# Altium PCB PCB1.PcbDoc
Units mm, origin at the board's own origin, x right, y up, seen from the top; angles counter-clockwise.
Board outline 77.72 x 126.24 mm, 2 copper layers (Top Layer, Bottom Layer); 16 components, 39 nets, 114 pads, 7 vias.
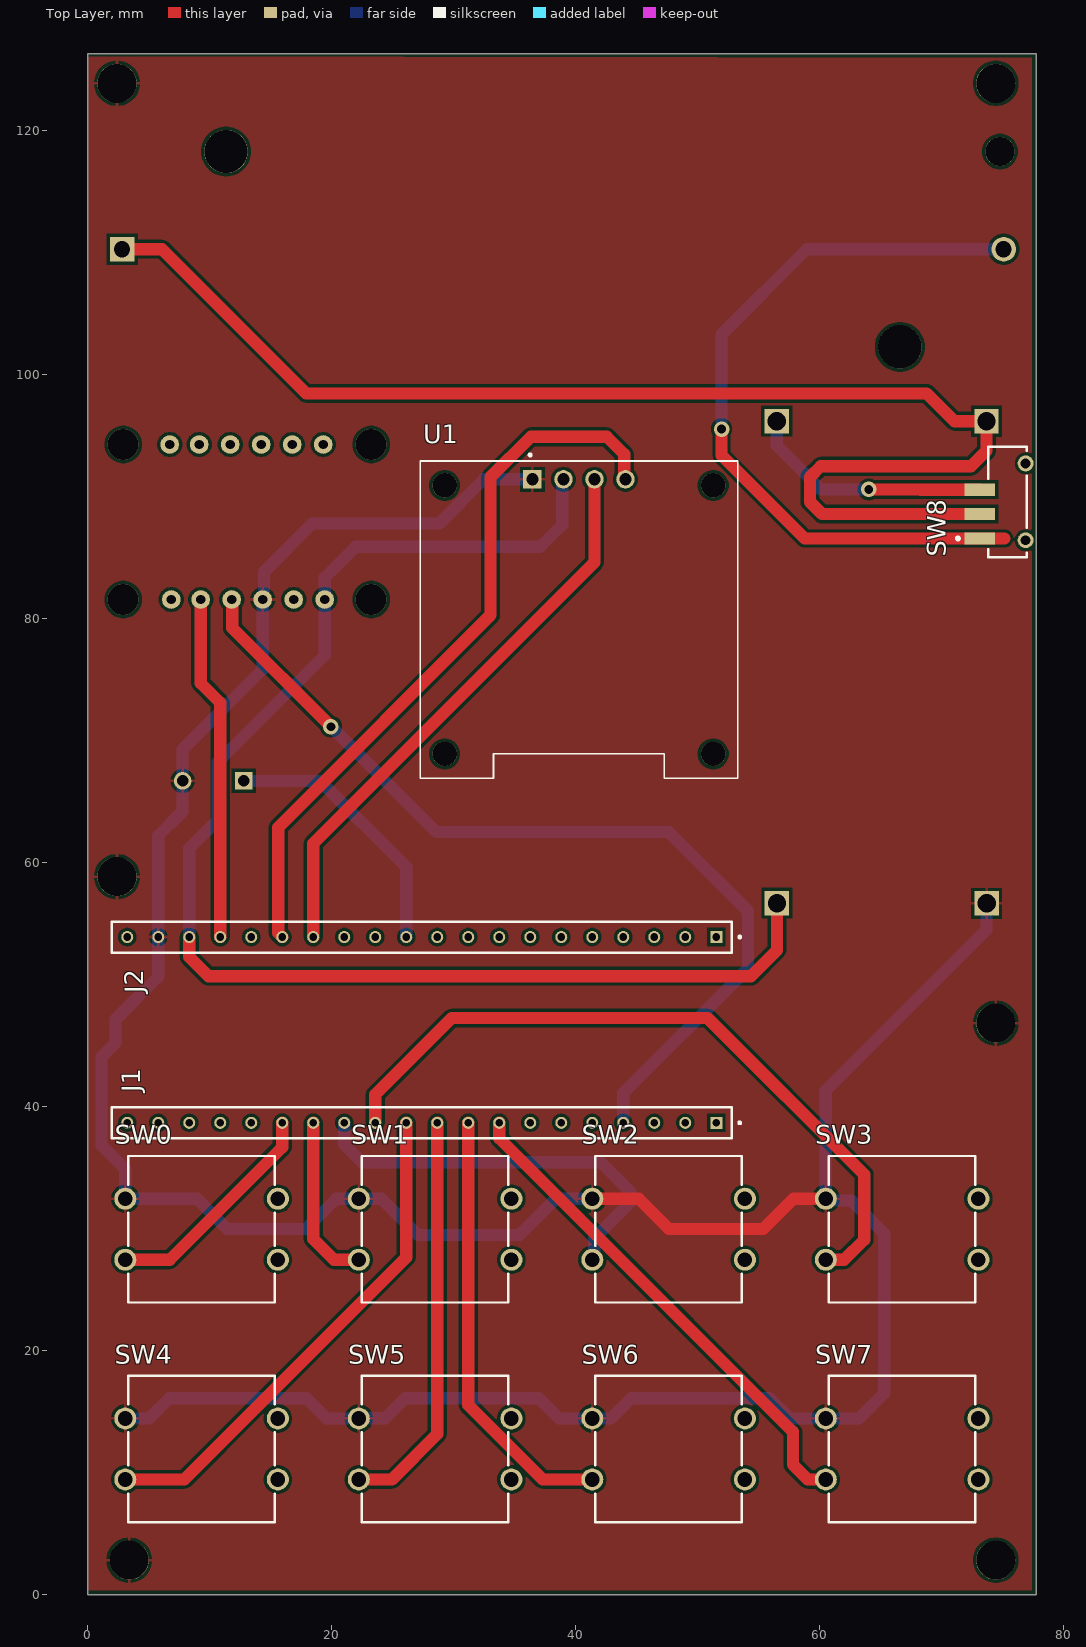
[diagram p0: Top Layer view]
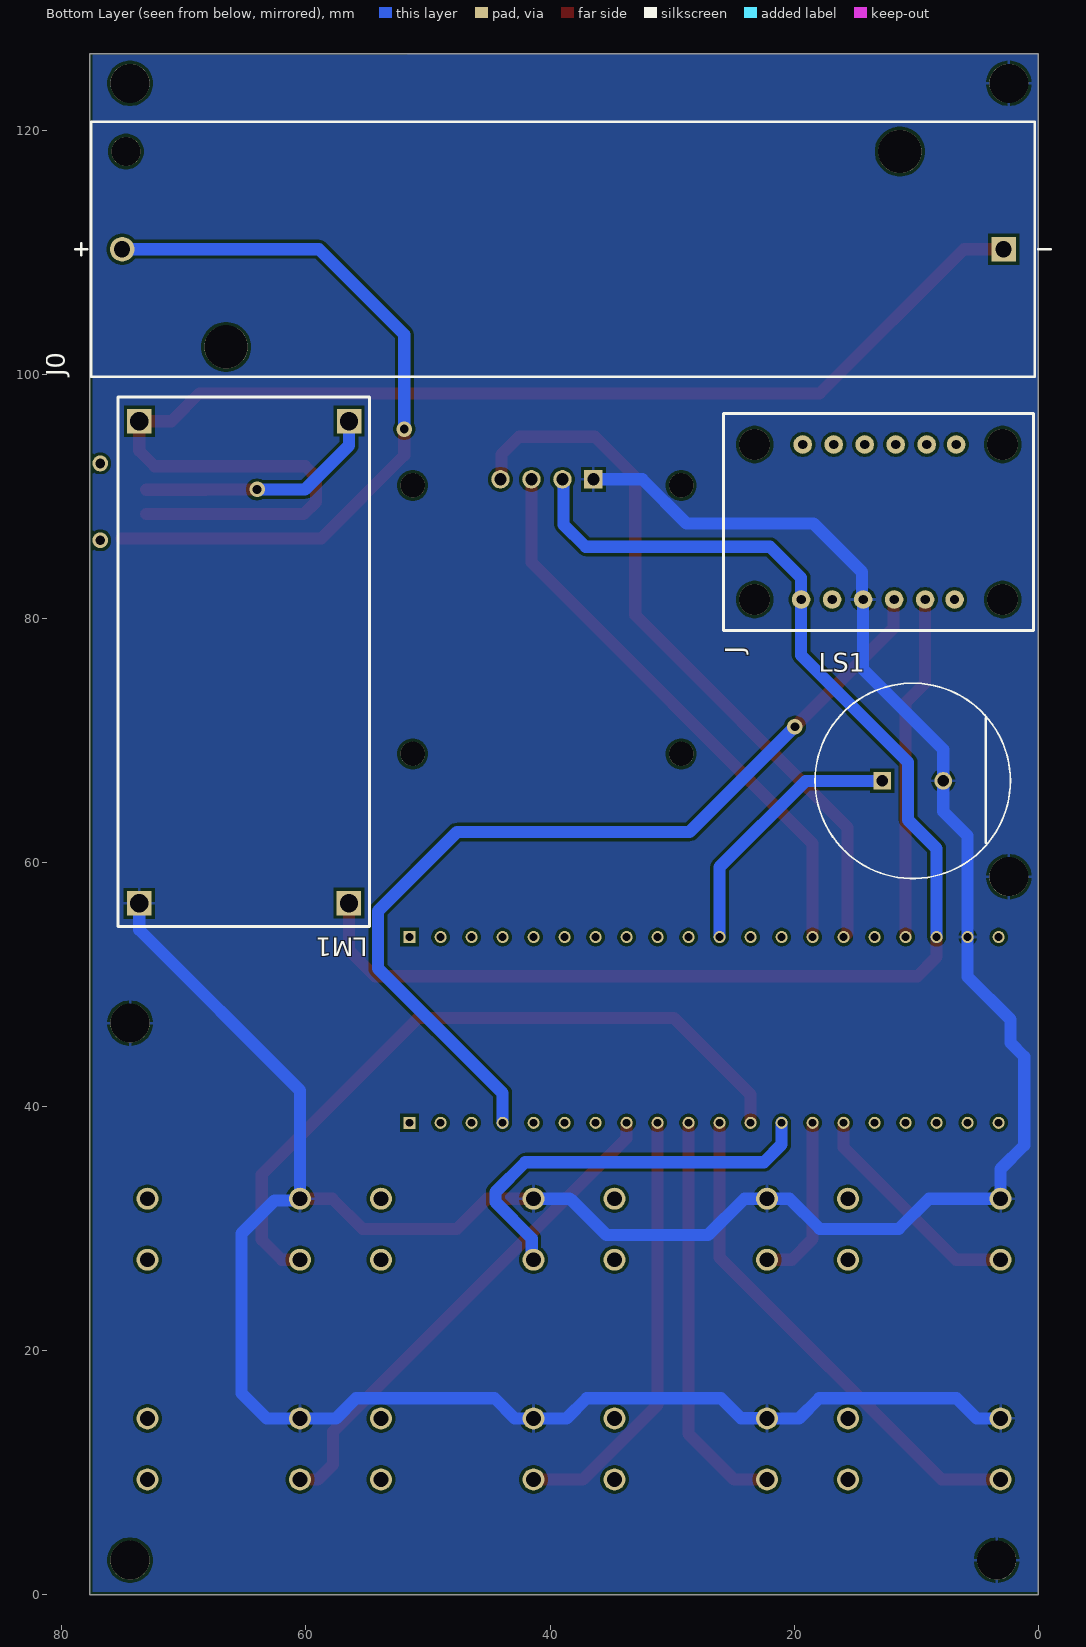
[diagram p1: Bottom Layer view, seen from below]
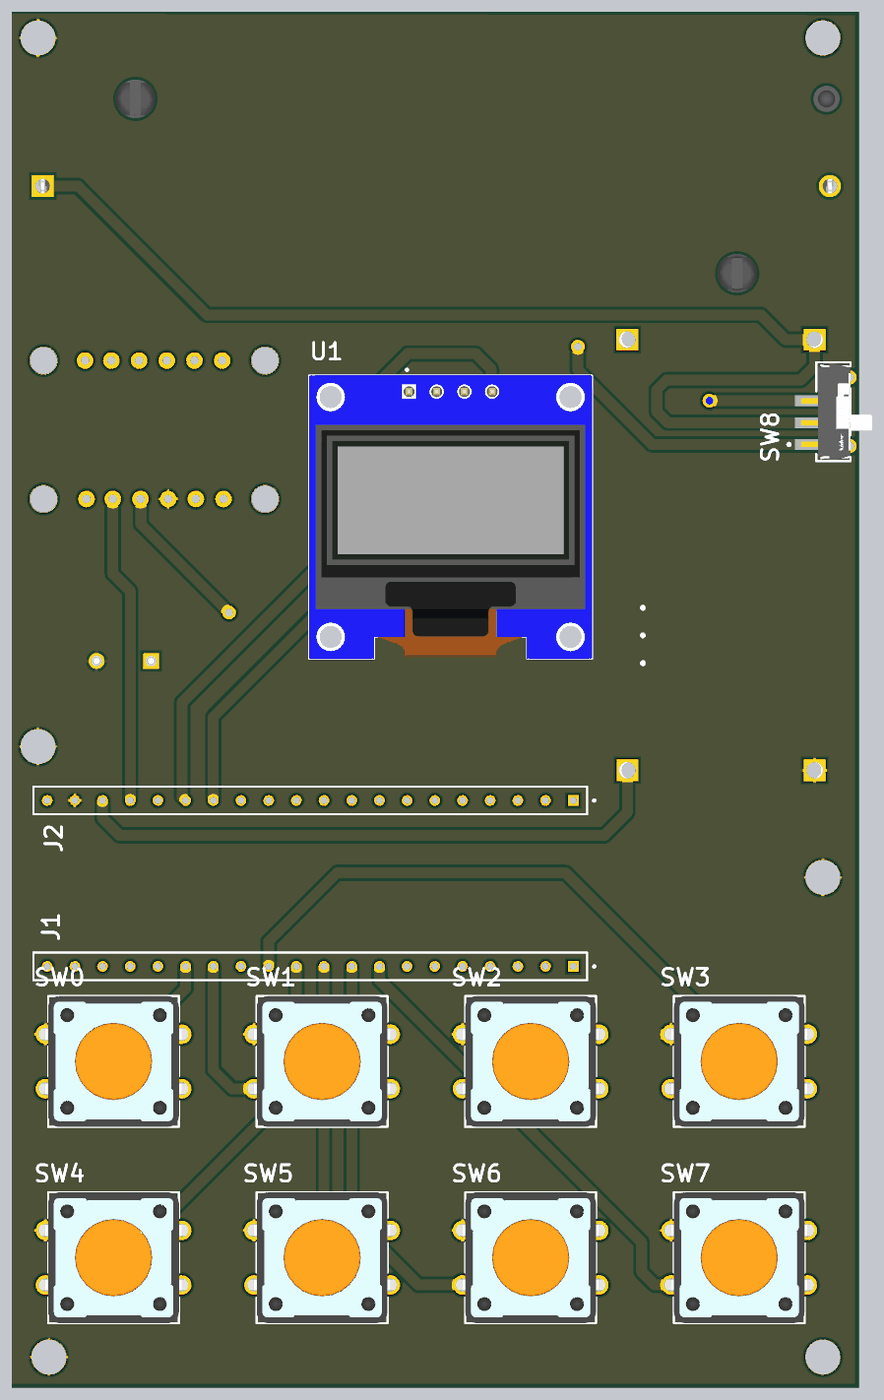
[diagram p2: 3D render of the assembled board from above, using the file's embedded part models]
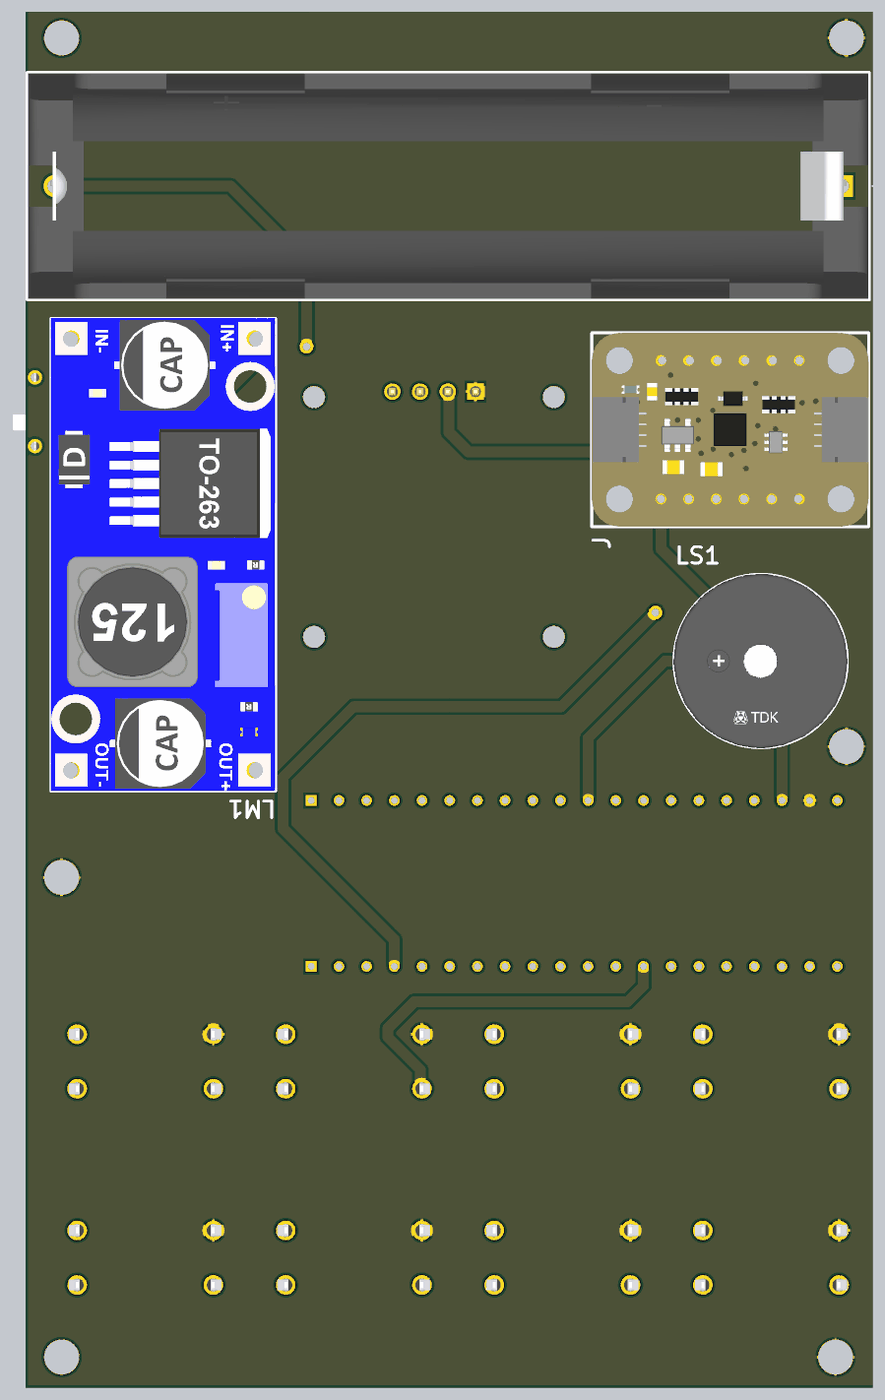
[diagram p3: 3D render of the assembled board from below, using the file's embedded part models]

## Layer stack, top to bottom
Top Solder: solder mask 0.0102, Solder Resist, Dk 3.5
Top Layer: signal copper 0.0356
Dielectric 1: dielectric 0.32, FR-4, Dk 4.8
Bottom Layer: signal copper 0.0356
Bottom Solder: solder mask 0.0102, Solder Resist, Dk 3.5

## Board outline
0,0 77.724,0 77.724,126.238 0,126.238

## Design rules (kind name [scope] priority, off if disabled: settings)
Clearance [All] p1: gap=0.254 ignorepadtopadclearanceinfootprint=FALSE except(0: Arc-Hole Track-Hole SMDPad-Hole THPad-Hole Via-Hole Fill-Hole Poly-Hole Region-Hole Text-Hole)
PolygonConnect [All] p1: connectstyle=Relief reliefconductorwidth=0.254 reliefentries=4 polygonreliefangle="90 Angle" airgapwidth=0.254
RoutingVias [All] p1: holewidth=0.711 width=1.27 viastyle="Through Hole" minholewidth=0.711 minwidth=1.27 maxholewidth=0.711 maxwidth=1.27
SolderMaskExpansion [All] p1: expansion=0.102 istentingtop=FALSE
Width [All] p1: maxlimit=1 minlimit=0.254 preferedwidth=0.254
30 further rules are at their usual default settings.

## Components (designator, comment, footprint, x,y, rotation, side; value= is the part's Value field where it differs from the comment)
J "LIS3DH" PCBComponent_1#1 0.381,78.994 r90 bottom
J0 "1043P" FP-1043P-MFG 38.947,110.236 r0 bottom
J1 "TS-120-T-AA" SAMTEC_TS-120-T-AA 27.381,38.661 r180 top
J2 "TS-120-T-AA" SAMTEC_TS-120-T-AA 27.381,53.881 r180 top
LM1 "LM2596" PCBComponent_1#2 75.639,97.99 r270 bottom
LS1 "SDC1610MT-01" FP-SDC1610MT-01-MFG 10.287,66.675 r180 bottom
SW0 "430476043716" 430476043716 9.341,29.94 r0 top
SW1 "430476043716" 430476043716 28.473,29.94 r0 top
SW2 "430476043716" 430476043716 47.606,29.94 r0 top
SW3 "430476043716" 430476043716 66.738,29.94 r0 top
SW4 "430476043716" 430476043716 9.341,11.94 r0 top
SW5 "430476043716" 430476043716 28.473,11.94 r0 top
SW6 "430476043716" 430476043716 47.606,11.94 r0 top
SW7 "430476043716" 430476043716 66.738,11.94 r0 top
SW8 "CSS-1210TB" FP-CSS-1210TB-MFG 76.454,89.535 r90 top
U1 "DM-OLED096-636" MODULE_DM-OLED096-636 40.259,79.883 r0 top

## Footprints (in the part's own frame and the unit in brackets; to place one, negate y for a bottom-side part, rotate by r counter-clockwise, add the part's x,y. Pads: shape width x height; smd on the part's side, far side on the other; paste and mask are expansions set on the pad)
430476043716 [mm] "12x12mm washable Tact Switch, THT version"
  round 1.8 hole 1.2: A1(-6.25,2.5) A2(6.25,2.5) B1(-6.25,-2.5) B2(6.25,-2.5)
  silkscreen extent -6,-6 6,6, body extent -6.99,-6 6.99,6, height 4.35
FP-1043P-MFG [mm]
  rect 2.02x2.02 hole 1.32 paste-2539.97 mask+0: 1(-36.11,0)
  round 2.02 hole 1.32 paste-2539.97 mask+0: 2(36.11,0)
  round 3.55 hole 3.55 unplated paste-2539.97 mask+0: ""(-27.6,-8) ""(27.6,8)
  round 2.39 hole 2.39 unplated paste-2539.97 mask+0: ""(35.8,-8)
  silkscreen extent -39.95,-10.45 39.95,10.45, body extent -38.53,-10.33 38.53,10.33, height 15.11
FP-CSS-1210TB-MFG [mm]
  rect 1x2.5 smd paste+0 mask+0: 1(-3,3.35) 2(-1,3.35) 3(1,3.35)
  round 1.3 hole 0.8 paste-2539.97 mask+0: 4(-3.15,-0.4) 5(3.15,-0.4)
  silkscreen extent -4.53,-0.5 4.53,5.27, body extent -4.62,-2.75 4.62,4.7, height 0.25
FP-SDC1610MT-01-MFG [mm]
  rect 1.45x1.45 hole 0.95 paste-2539.97 mask+0: 1(-2.5,0)
  round 1.45 hole 0.95 paste-2539.97 mask+0: 2(2.5,0)
  silkscreen extent -8,-8 8,8, body extent -8,-8 8,7.99, height 10
MODULE_DM-OLED096-636 [mm]
  rect 1.508x1.508 / inner round 1.508 / far side rect 1.508x1.508 hole 1: 1(-3.81,11.5)
  round 1.508 hole 1: 2(-1.27,11.5) 3(1.27,11.5) 4(3.81,11.5)
  round 2 hole 2: S1(-11,11) S2(11,11) S3(11,-11) S4(-11,-11)
  silkscreen extent -13,-13 13,13.6, body extent -13,-13 13,13, height 5.66
PCBComponent_1#1 [mil]
  round 60 hole 30: 1(100,750) 2(100,650) 3(100,550) 4(100,450) 5(100,350) 6(100,255) 7(600,250) 8(600,345) 9(600,445) 10(600,545) 11(600,645) 12(600,745)
  silkscreen extent 0,0 700,1000, body extent 0,0 700,1000, height 178
PCBComponent_1#2 [mil]
  rect 78.74x78.74 hole 59.06: 1(1627.38,754.33) 2(1627.87,77.91) 3(72.4,754.69) 4(72.89,78.27)
  silkscreen extent -5,10 1703,821, body extent -6,9 1702,820, height 518
SAMTEC_TS-120-T-AA [mm]
  rect 0.985x0.985 / inner round 0.985 / far side rect 0.985x0.985 hole 0.635: 01(-24.13,0)
  round 0.985 hole 0.635: 02(-21.59,0) 03(-19.05,0) 04(-16.51,0) 05(-13.97,0) 06(-11.43,0) 07(-8.89,0) 08(-6.35,0) 09(-3.81,0) 10(-1.27,0) 11(1.27,0) 12(3.81,0) 13(6.35,0) 14(8.89,0) 15(11.43,0) 16(13.97,0) 17(16.51,0) 18(19.05,0) 19(21.59,0) 20(24.13,0)
  silkscreen extent -26.15,-1.27 25.4,1.27

## Part data
J0: library part CMP-19636-000034-1, "BATT HOLDER 18650 1 CELL PC PIN", Max Operating Temperature=145°C, Min Operating Temperature=-50°C, Package Quantity=50, Mount="Through Hole", Number of Cells=1, Packaging=Tray, Series=-, Termination="PC Pin"
J1 J2: "Headers & Wire Housings .100 Single Row Screw Machine Terminal Strip", Package=None, Availability="In Stock", Check_prices=https://www.snapeda.com/parts/TS-120-T-AA/Samtec/view-part/?ref=eda, MF=Samtec, MP=TS-120-T-AA, Price=None, Purchase-URL=https://pricing.snapeda.com/search?q=TS-120-T-AA&ref=eda, SnapEDA_Link=https://www.snapeda.com/parts/TS-120-T-AA/Samtec/view-part/?ref=snap
LS1: library part CMP-08413-000010-1, "AUDIO MAGNETIC IND 8-16V TH", Frequency=2.4kHz, Max Operating Temperature=70°C, Max Supply Current=25mA, Min Operating Temperature=-10°C, Nominal Supply Voltage (DC)=12V, Diameter=16mm, Height=10mm, Input Type=DC, Lead Free="Lead Free", Mount="Through Hole", Operating Supply Current=25mA, Packaging=Tray, Sensing Method=Magnetic, Series=SDC, Termination="PC Pins", Voltage Rating=12V
SW0 SW1 SW2 SW3 SW4 SW5 SW6 SW7: library part CMP-1456-00007-3, "Switch Tactile Spst-no 0.05A 12V", Contact Current Rating=50mA, Insulation Resistance=100MΩ, Max Operating Temperature=85°C, Min Operating Temperature=-40°C, Voltage Rating=12V, Actuator Length=800µm, Actuator Material="Liquid Crystal Polymer, Polymer", Contact Material="Silver, Stainless Steel", Contact Plating=Silver, Current Rating=50mA, Height=4.3mm, Illumination Type="Illuminated, Non-Illuminated", Mechanical Life=500kcycles, Mount="Through Hole", Packaging=Bulk, REACH SVHC="No SVHC", RoHS=Compliant, Switch Function=Off-Mom, Switch Travel=300µm, Termination="PC Pin", Throw Configuration=SPST
SW8: library part CMP-71745-000010-1, "SWITCH SLIDE SPDT 100MA 12V", Case/Package=SMD/SMT, Contact Current Rating=100mA, Max Operating Temperature=70°C, Max Voltage Rating (DC)=12V, Min Operating Temperature=-20°C, Operating Force=357gf, Actuator Length=2mm, Actuator Material=Polymer, Actuator Type=Standard, Contact Material="Copper Alloy", Contact Plating=Gold, Contact Style=Non-Shorting, Current Rating=100mA, Electrical Life=10000Cycles, Mount="Surface Mount", Number of Poles=1, Number of Positions=2, Orientation="Right Angle", Packaging="Tape and Reel", Radiation Hardening=No, RoHS Compliant=Yes, Series=CSS, Switch Function=On-On, Switch Travel=2mm, Termination="Gull Wing", Throw Configuration=SPDT, Voltage Rating (DC)=12V
U1: "0.96â€ 128 X 64 MONOCHROME GRAPHIC OLED DISPLAY MODULE - I2C", Package=Package, Check_prices=https://www.snapeda.com/parts/DM-OLED096-636/Display+Module/view-part/?ref=eda, MF="Display Module", MP=DM-OLED096-636, SnapEDA_Link=https://www.snapeda.com/parts/DM-OLED096-636/Display+Module/view-part/?ref=snap

## Free pads (board coordinates)
  round 3.2 hole 3.2: 4(2.412,58.825) 4(2.412,123.825) 4(3.412,2.825) 4(74.412,2.825) 4(74.412,46.825) 4(74.412,123.825)

## Via types
v1: diameter 2.54, hole 2.54, Top Layer to Bottom Layer, 4 vias
v2: diameter 1.27, hole 0.711, Top Layer to Bottom Layer, 3 vias

## Nets (pads, with @x,y where several pads share a name; then routed paths per layer and width w, separated by ;. In a path a pad name is that pad's centre, name@x,y a point inside that pad or via, vN(x,y) a via of type N, cw(c..) or ccw(c..) an arc to the next point about the centre after c; other vN are vias at no path point)
+3.3V: J2.18 J.1 LM1.1 U1.2 | length 114.2
  Top Layer w1: J2.18 8.331,52.248 9.906,50.673 54.356,50.673 56.479,52.796 LM1.1
  Bottom Layer w1: J2.18 8.331,61.142 10.668,63.479 10.668,68.199 19.431,76.962 19.431,83.312 21.971,85.852 37.084,85.852 38.892,87.66 38.892,91.286 U1.2
A0: J1.15 SW0.B1 | length 18.7
  Top Layer w1: SW0.B1 6.739,27.44 15.951,36.652 J1.15
A1: J1.14 SW1.B1 | length 14
  Top Layer w1: J1.14 18.491,29.134 20.185,27.44 SW1.B1
A2: J1.13 SW2.B1 | length 33.7
  Bottom Layer w1: J1.13 21.031,36.881 22.479,35.433 42.037,35.433 44.48,32.99 44.48,32.161 41.509,29.19 41.509,27.593 SW2.B1
A3: J1.12 SW3.B1 | length 59.4
  Top Layer w1: J1.12 23.571,40.97 29.845,47.244 50.8,47.244 63.627,34.417 63.627,29.083 61.984,27.44 SW3.B1
A4: J1.11 SW4.B1 | length 41.6
  Top Layer w1: SW4.B1 7.916,9.44 26.111,27.635 J1.11
A5: J1.10 SW5.B1 | length 33.5
  Top Layer w1: SW5.B1 24.934,9.44 28.651,13.157 J1.10
A6: J1.09 SW6.B1 | length 35.8
  Top Layer w1: J1.09 31.191,15.545 37.296,9.44 SW6.B1
A7: J1.08 SW7.B1 | length 41.2
  Top Layer w1: J1.08 33.731,37.404 57.785,13.35 57.785,10.668 59.013,9.44 SW7.B1
A8: J2.05
A9: J2.06
A10: J2.07
A11: J2.08
A12: J2.09
A15: J2.10
B0: J1.07
B1: J1.06
B2: J1.05
B3: J2.11 LS1.1 | length 22
  Bottom Layer w1: LS1.1 19.05,66.675 26.111,59.614 J2.11
B4: J2.12
B5: J2.13
B6: J2.14 U1.3 | length 47
  Top Layer w1: J2.14 18.491,61.544 41.529,84.582 U1.3
B7: J2.15 U1.4 | length 60
  Top Layer w1: J2.15 15.621,54.211 15.621,62.865 33.02,80.264 33.02,91.567 36.322,94.869 42.545,94.869 43.972,93.442 43.972,91.48 U1.4
B8: J2.16
B9: J2.17 J.5 | length 28.3
  Top Layer w1: J.5 9.271,74.676 10.871,73.076 J2.17
B10: J1.04 J.4 | length 75.8
  Top Layer w1: J.4 11.86,81.485 11.86,79.199 v2(19.939,71.12)
  Bottom Layer w1: v2(19.939,71.12) 28.575,62.484 47.625,62.484 54.102,56.007 54.102,51.308 43.891,41.097 J1.04
B12: J2.01
B13: J2.02
B14: J2.03
B15: J2.04
C13: J1.19
C14: J1.18
C15: J1.17
GND: J2.19 J.3 LM1.2 LS1.2 pad.4@2.412,58.825 pad.4@2.412,123.825 pad.4@3.412,2.825 pad.4@74.412,46.825 SW0.A1 SW1.A1 SW2.A1 SW3.A1 SW4.A1 SW5.A1 SW6.A1 SW7.A1 U1.1 | length 262.6
  Top Layer w1: SW2.A1 45.157,32.44 47.625,29.972 55.372,29.972 57.84,32.44 SW3.A1
  Bottom Layer w1: SW4.A1 5.042,14.44 6.696,16.094 17.942,16.094 19.596,14.44 SW5.A1 22.24,14.457 24.363,14.457 26,16.094 36.992,16.094 38.646,14.44 42.888,14.44 44.542,16.094 55.894,16.094 57.548,14.44 SW7.A1 63.208,14.44 65.278,16.51 65.278,29.591 62.582,32.287 60.641,32.287 SW3.A1 60.488,41.311 73.66,54.483 LM1.2 ; U1.1 32.455,91.383 28.829,87.757 18.415,87.757 14.451,83.793 14.451,81.634 J.3 14.351,75.819 7.787,69.255 LS1.2 7.787,64.175 5.791,62.179 J2.19 5.791,50.622 2.286,47.117 2.286,45.212 1.143,44.069 1.143,36.83 3.091,34.882 SW0.A1 8.965,32.44 11.433,29.972 17.907,29.972 20.375,32.44 SW1.A1 24.075,32.44 27.051,29.464 35.37,29.464 38.291,32.385 38.354,32.385 38.409,32.44 SW2.A1
NetJ0_1: J0.1 LM1.4 SW8.2 | length 110.8
  Top Layer w1: J0.1 6.096,110.236 17.907,98.425 68.74,98.425 71.026,96.138 LM1.4 73.651,93.717 72.385,92.451 60.066,92.451 59.182,91.567 59.182,89.535 60.182,88.535 SW8.2
NetJ0_2: J0.2 SW8.1 | length 61.9
  Top Layer w1: v2(51.943,95.504) 51.943,93.345 58.753,86.535 SW8.1 75.105,86.535
  Bottom Layer w1: v2(51.943,95.504) 51.943,103.251 58.928,110.236 J0.2
NetLM1_3: LM1.3 SW8.3 | length 20.1
  Top Layer w1: v2(64.008,90.551) 68.235,90.551 68.251,90.535 SW8.3
  Bottom Layer w1: LM1.3 56.47,94.152 60.071,90.551 v2(64.008,90.551)
R: J1.16
VB: J1.20
pads on no net: J0. J1.01 J1.02 J1.03 J2.20 J.2 J.6 J.7 J.8 J.9 J.10 J.11 J.12 SW0.A2 SW0.B2 SW1.A2 SW1.B2 SW2.A2 SW2.B2 SW3.A2 SW3.B2 SW4.A2 SW4.B2 SW5.A2 SW5.B2 SW6.A2 SW6.B2 SW7.A2 SW7.B2 SW8.4 SW8.5 U1.S1 U1.S2 U1.S3 U1.S4
copper on no net:
  other v1: 2.921,81.534 23.241,81.534 2.921,94.234 23.241,94.234

## Polygon pours and split planes (outlines as drawn)
GND on Top Layer "GND_L01_P000" (solid, pour order 0): 0,126.041 0,0.381 77.343,0.381 77.343,125.922
GND on Bottom Layer "GND_L02_P001" (solid, pour order 1): 0,126.285 0,0.254 77.47,0.254 77.47,126.157